# Altium PCB CAMERA.PcbDoc (part 2 of 2)
Units mm, origin at the board's own origin, x right, y up, seen from the top; angles counter-clockwise.
Board outline 40.01 x 40 mm, 8 copper layers (L1-TOP, L2-GND/PWR, L3-GND, L4-SIGNAL, L5-SIGNAL, L6-GND, L7-GND/PWR, L8-BOT), stack 1.6 mm thick; 313 components, 254 nets, 1654 pads, 0 vias.
Unrouted connection lines stored in the file: 1132.
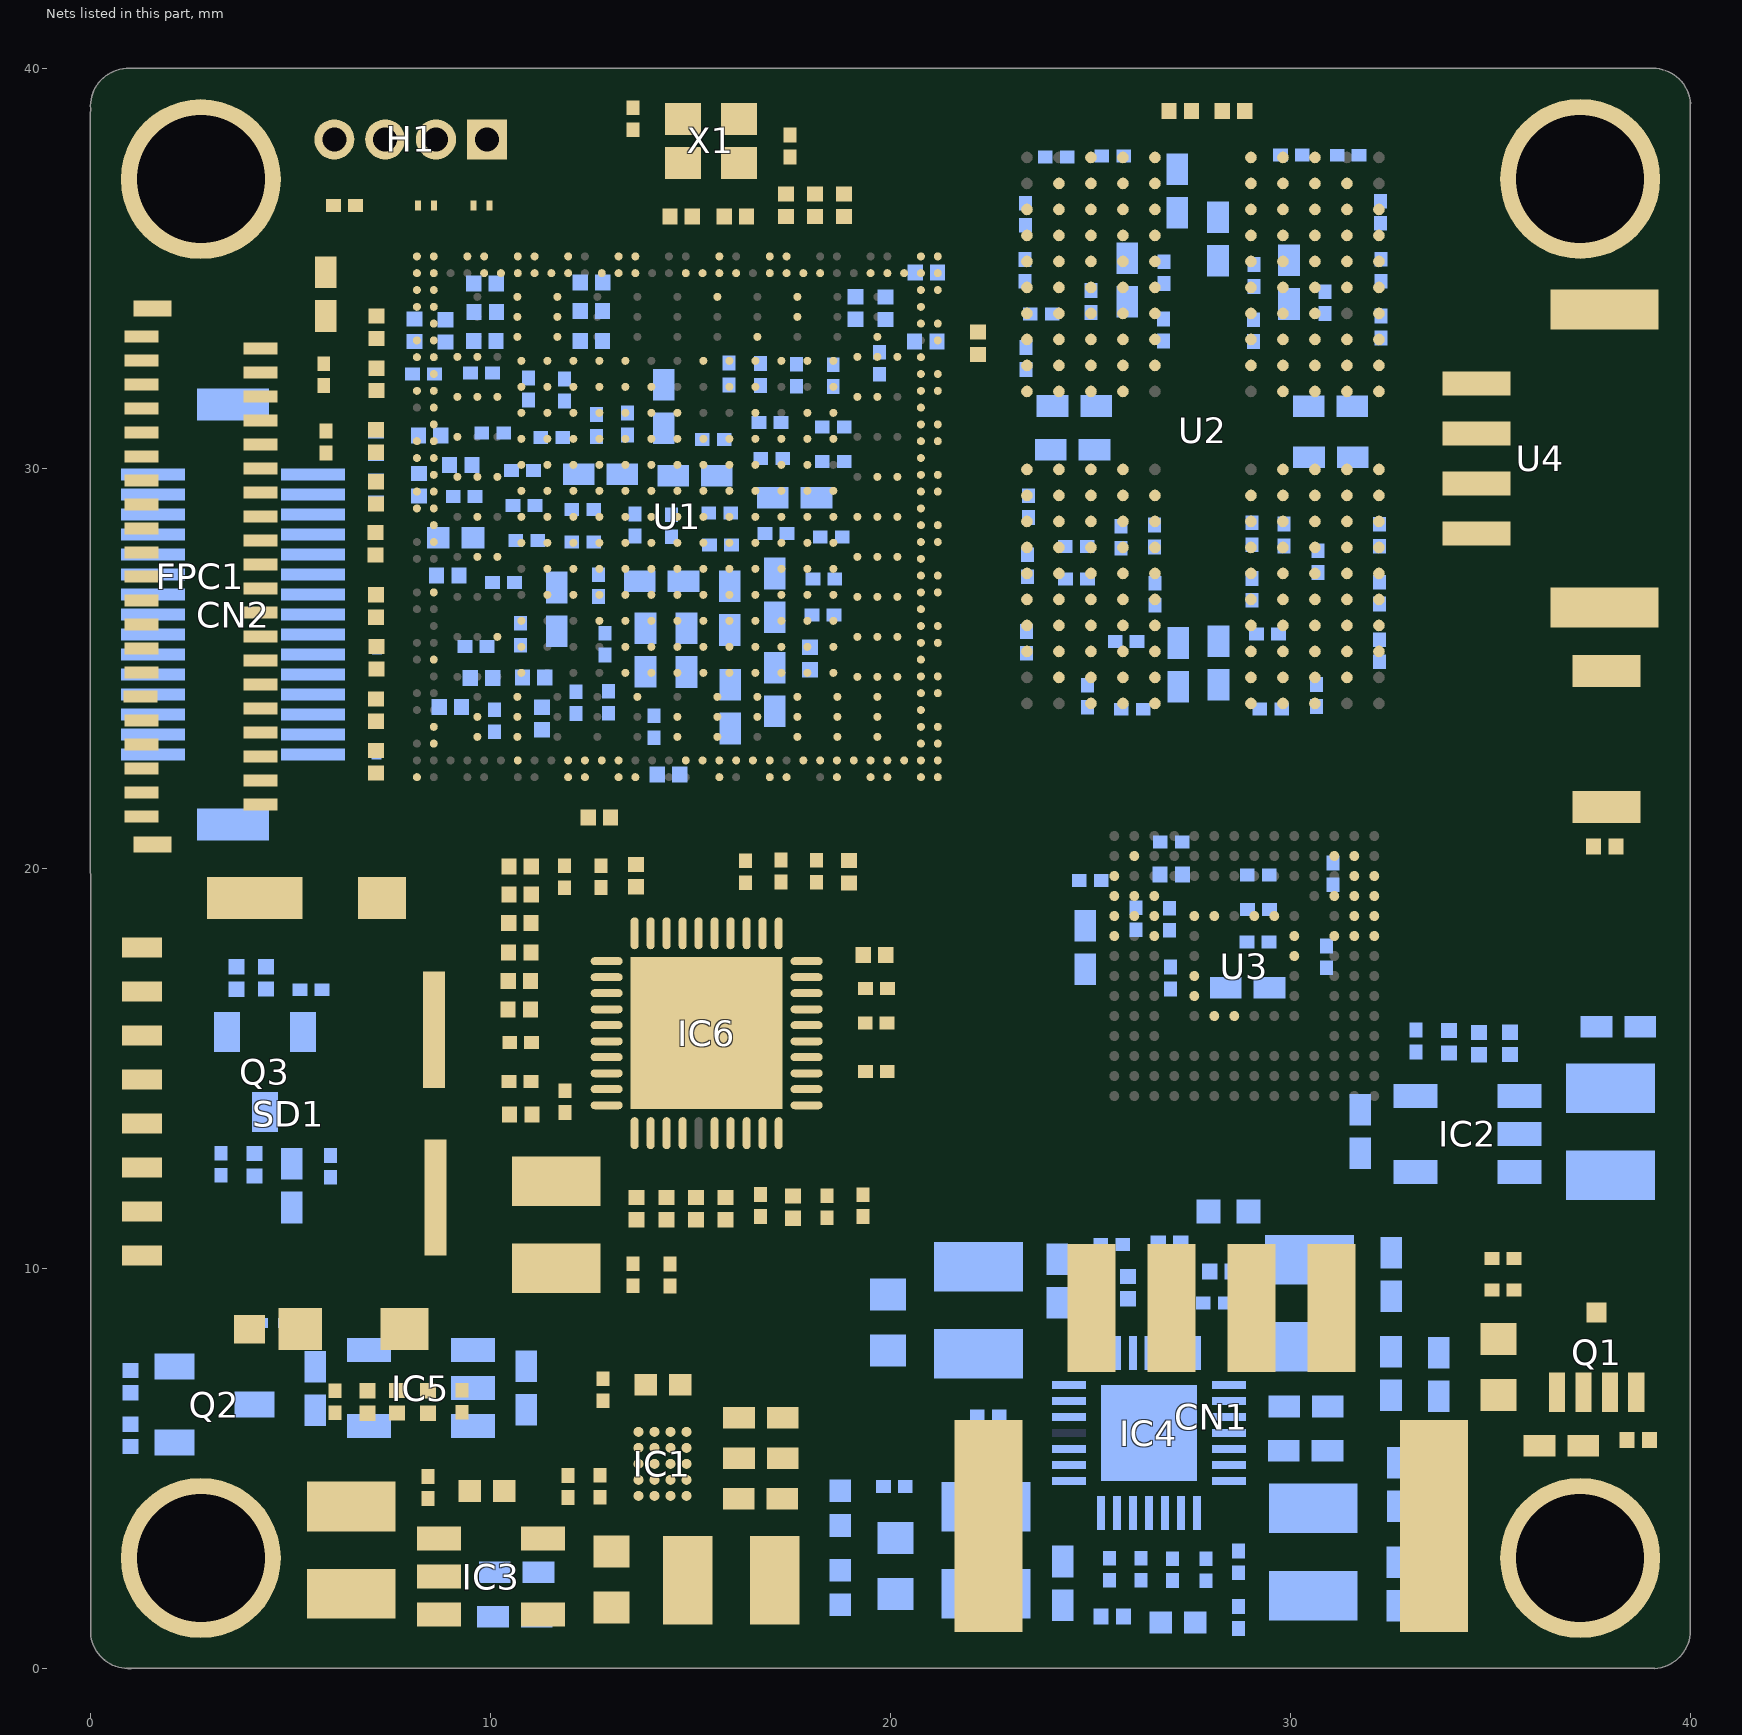
[diagram p2: the nets of this part, all layers, seen from the top]

## Part data
C1: library part CAP_22uF-25V-20%-0603, "22uF ±20% 25V Ceramic Capacitor X5R 0603"
C2 C8 C10 C11 C17 C18 C34: library part CAP_100nF-16V-10%-0201, "CAP CER 100nF 16V X5R 0201"
C3 C21 C22 C23 C24 C25 C27 C38 C39 C41: library part CAP_1uF-10V-10%-0201, "1uF ±10% 10V Ceramic Capacitor X5R 0201"
C4 C139 C141 C144: library part CAP_4.7uF-16V-10%-0402, "4.7uF ±10% 16V Ceramic Capacitor X5R 0402"
C5 C6 C7 C13 C16 C29 C30 C31 C35 C36 C37: library part CAP_22uF-10V-20%-0402, "22uF X5R ±20% 10V 0402 Ceramic Capacitors RoHS", ComponentLink1Description=LCSC, ComponentLink1URL=https://www.lcsc.com/product-detail/C385994.html?s_z=n_q_t_22UF&spm=wm.fly.bg.2.xh___wm.ssy.tc.2.tz&lcsc_vid=EwRWBFZSQVIPVFdUTlJfVldeFFRYUFQAElRYBFRRE1MxVlNeRFZbX1BRRVlbVDsOAxUeFF5JWBYZEEoKFBINSQcJGk4NBhADEA4cHktXRlhXSQwSGg0%3D
C9 C19 C28: library part CAP_22uF-16V-20%-0603, "22uF ±20% 16V Ceramic Capacitor X5R 0603"
C12 C15 C26 C32 C33 C40 C43 C46 C49 C50 C54 C55 C56 C59 C67 C70 C75 C81 C85 C99 C103 C117 C128 C133 C184: library part CAP_10uF-10V-20%-0402, "10µF ±20% 10V Ceramic Capacitor X5R 0402 (1005 Metric)"
C14: library part CAP_22pF-50V-5%-0201, "CAP CER 22pF 50V NP0 0201"
C20: library part CAP_47pF-50V-5%-0201, "CAP CER  47pF ±5% 50V C0G 0201"
C42 C45 C48 C53 C58 C63 C64 C65 C66 C69 C71 C72 C73 C74 C76 C77 C83 C87 C88 C89 C90 C91 C92 C93 C94 C95 C96 C97 C101 C105 C106 C107 C108 C109 C110 C111 C112 C113 C114 C115 C119 C120 C121 C122 C124 C125 C126 C127 C130 C131 C132 C135 C136 C137 C138 C143 C145 C146 C147 C148 C152 C153 C154 C155 C156 C157 C158 C159 C160 C161 C162 C163 C164 C165 C166 C168 C169 C170 C172 C173 C174 C175 C178 C180 C181 C183 C185 C189 C190: library part CAP_100nF-6.3V-10%-0201_1, "0.1uF ±10% 6.3V Ceramic Capacitor X5R 0201"
C44 C47 C52 C57 C62 C68 C82 C86 C100 C104 C118 C129 C134 C149 C167 C171 C176 C177 C179 C182: library part CAP_1uF-6.3V-10%-0201, "1uF ±10% 6.3V Ceramic Capacitor X5R 0201"
C51: library part CAP_4.7uF-10V-10%-0402, "4.7µF ±10% 10V Ceramic Capacitor X5R 0402 (1005 Metric)"
C60 C61: library part CAP_15pF-25V-5%-0201, "CAP CER 15pF 50V NP0 0201", ComponentLink1Description=LCSC, ComponentLink1URL=https://www.lcsc.com/product-detail/C277480.html?s_z=n_q_t_15PF&spm=wm.fly.bg.0.xh___wm.ssy.tc.0.tz&lcsc_vid=EwRWBFZSQVIPVFdUTlJfVldeFFRYUFQAElRYBFRRE1MxVlNeRFdcX11TTlBaVjsOAxUeFF5JWBYZEEoKFBINSQcJGk4NBhADEA4cHktXRlRZSQwSGg0%3D
C80 C84 C98 C102 C116: library part CAP_22uF-6.3V-20%-0402, "22uF X5R ±20% 6.3V 0402 Ceramic Capacitors RoHS", ComponentLink1Description=LCSC, ComponentLink1URL=https://www.lcsc.com/product-detail/C385994.html?s_z=n_q_t_22UF&spm=wm.fly.bg.2.xh___wm.ssy.tc.2.tz&lcsc_vid=EwRWBFZSQVIPVFdUTlJfVldeFFRYUFQAElRYBFRRE1MxVlNeRFZbX1BRRVlbVDsOAxUeFF5JWBYZEEoKFBINSQcJGk4NBhADEA4cHktXRlhXSQwSGg0%3D
C140 C142 C150 C151: library part CAP_1nF-50V-10%-0201, "CAP CER 1nF 50V X7R 0201"
CN1: library part 5023520401, "DuraClik(MX 2.0) 125V 4 1 2mm 3A Surface Mount, Right Angle Tin -40℃~+105℃ 4P Black 1x4P SMD,P=2mm,Surface Mount,Right Angle Headers, Male Pins RoHS"
CN2: "0.5mm Pitch SMT Board-to-Board Connectors, 5Gbps Transmission Speed"
D1: library part LTVS8H5.0CAT5G
D2 D3 D4 D5 D6 D7 D8 D9 D10 D11 D12 D13 D14 D15: library part PESD5V0H1BSFYL, "ESD DIODE 5VWM 5VC DSN0603-2 0.13PF"
FPC1: "CONN FFC FPC 41POS 0.3mm TOP AND BOTTOM CNT SMD R/A"
H1: library part PZ127V-11-04-0720, "Through Hole -40℃~+105℃ 2P 1A 4.3mm 1x2P 1.27mm Top 1 Square Hole Through Hole,P=1.27mm Headers, Receptacles, Female Sockets RoHS"
IC1: "High-efficiency 5.5V, 6A, 2.4MHz synchronous buck regulator"
IC2 IC3: "High Efficiency, 1.5MHz, 2A Synchronous Step Down Regulator", ComponentLink1Description=LCSC, ComponentLink1URL=https://www.lcsc.com/product-detail/C479074.html?s_z=n_q_SY8089A&spm=wm.fly.bg.0.xh&lcsc_vid=EwRWBFZSQVIPVFdUTlJfVldeFFRYUFQAElRYBFRRE1MxVlNeRVlcV1JUT1FeXzsOAxUeFF5JWBYZEEoKFBINSQcJGk4NBhADEA4cHktXR1NXSQwSGg0%3D
IC4: "I2C QFN-28-EP(4x4) Power Management - Specialized RoHS"
IC5: "300mA, Ultra-low noise, Small Package Ultra-Fast CMOS LDO Regulator", ComponentLink1Description=LCSC, ComponentLink1URL=https://www.lcsc.com/product-detail/C324567.html?s_z=n_q_LP3983SAB5F-08&spm=wm.fly.bg.0.xh&lcsc_vid=EwRWBFZSQVIPVFdUTlJfVldeFFRYUFQAElRYBFRRE1MxVlNeRVlfX1BQRFFcUTsOAxUeFF5JWBYZEEoKFBINSQcJGk4dAgUUFAk%3D
IC6: "Integrated 10/100/1000M Ethernet Precision Transceiver"
L1 L4 L5: library part IND_470nH-6.5A-20%-1008, "FIXED IND 0.47uH 6.5A 13mΩ SMD,2x2.5mm", Case/Package=1008, Manufacturer="Murata Electronics", Manufacturer Part Number=DFE252010P-R47M=P2, Supplier-1=Digikey
L2 L3: library part IND_1uH-4A-20%-1008, "FIXED IND 01uH 4A 35mΩ SMD,2x2.5mm", Case/Package=1008, Manufacturer="Murata Electronics", Manufacturer Part Number=DFE252010P-R47M=P2, Supplier-1=Digikey
L6 L7: library part IND_2.2uH-4.1A-20%-1008, "2.2uH Shielded Wirewound Inductor 4.1A 60mOhm Max 1008 (2520 Metric)", Case/Package=1008, Manufacturer="Murata Electronics", Manufacturer Part Number=DFE252010-R47M=P2, ComponentLink1Description=LCSC, ComponentLink1URL=https://www.lcsc.com/product-detail/C45385204.html?s_z=n_q_t_2.2UH&spm=wm.fly.bg.0.xh___wm.ssy.tc.0.tz&lcsc_vid=EwRWBFZSQVIPVFdUTlJfVldeFFRYUFQAElRYBFRRE1MxVlNeRVlWUV1XQ1hZVjsOAxUeFF5JWBYZEEoKFBINSQcJGk4NBhADEA4cHktXRlVcSQwSGg0%3D, Supplier-1=Digikey
L8 L9 L10 L11 L12 L13: library part MPZ0603S121HT000, "120 Ohms @ 100MHz 1 Power Line Ferrite Bead 0201 1A 130mOhm", Simulation ModelName=FB_220_ADV, Simulation ModelText=".SUBCKT FB_220_ADV 1 2 /  / Rdc 1 2 0.045 /  / * low freq inductive / L1 1 3 50n / R1 3 2 1 /  / * high freq loss / R2 1 2 200 / Cpar 1 2 2p /  / .ends FB_220_ADV", Simulation PortMap=(1:1),(2:2)
L14: library part IND_2.2uH-4.1A-20%-1008, "2.2uH Shielded Wirewound Inductor 4.1A 60mOhm Max 1008 (2520 Metric)", Case/Package=1008, Manufacturer="Murata Electronics", Manufacturer Part Number=DFE252010P-R47M=P2, Supplier-1=Digikey
Q1: library part SI7615CDN-T1-GE3-MS, "22W 20V 60A 700mV 7mΩ@4.5V 1 P-Channel P-Channel DFN-8L(3x3) Single FETs, MOSFETs RoHS", Case/Package="PowerPAK® 1212-8", Manufacturer="Vishay Siliconix", Manufacturer Part Number=SI7615CDN-T1-GE3, Supplier-1=Digikey
Q2: library part JSM2302A-A2SHB, "MOSFET N-CH 20V 3A SOT-23"
Q3: library part WPM3407-3/TR, "MOSFET P-CH 30V 4.4A SOT-23"
R1 R3: library part RES_200K-50mW-1%-0201, "RES 200kΩ ±1% 50mW 0201", Simulation ModelName=R_Resistor_Default, Simulation ModelText="R_Resistor_Default 1 0 1K", Simulation PortMap=(1:1),(2:2)
R2 R6: library part RES_23.7K-0.063W-0.1%-0402, "RES 23700Ω ±0.1% 0.063W 0402", ComponentLink1Description=LCSC, ComponentLink1URL=https://www.lcsc.com/product-detail/C2076022.html?s_z=n_q_t_23.7K&spm=wm.fly.bg.0.xh___wm.ssy.tc.0.tz&lcsc_vid=EwRWBFZSQVIPVFdUTlJfVldeFFRYUFQAElRYBFRRE1MxVlNeRFdWV1xeQVRYUzsOAxUeFF5JWBYZEEoKFBINSQcJGk4NBhADEA4cHktXR1NXSQwSGg0%3D, Simulation ModelName=R_Resistor_Default, Simulation ModelText="R_Resistor_Default 1 0 1K", Simulation PortMap=(1:1),(2:2)
R4 R35 R39: library part RES_100K-50mW-1%-0201, "RES 100kΩ ±1% 50mW 0201", ComponentLink1Description=LCSC, ComponentLink1URL=https://www.lcsc.com/product-detail/C295718.html?s_z=n_q_t_120%2520OHM&spm=wm.fly.bg.5.xh___wm.ssy.tc.1.tz&lcsc_vid=EwRWBFZSQVIPVFdUTlJfVldeFFRYUFQAElRYBFRRE1MxVlNeRFZeU1BfTlBYVzsOAxUeFF5JWBYZEEoKFBINSQcJGk4eFQsCAgIaSgADAwAHC0slRVhcV1ZTT08GEwkK, Simulation ModelName=R_Resistor_Default, Simulation ModelText="R_Resistor_Default 1 0 1K", Simulation PortMap=(1:1),(2:2)
R5 R26 R33 R36 R38 R40 R47 R48 R50 R55: library part RES_10K-50mW-1%-0201, "RES 10KΩ ±1% 50mW 0201", ComponentLink1Description=LCSC, ComponentLink1URL=https://www.lcsc.com/product-detail/C93949.html?spm=wm.fly.bg.0.xh&lcsc_vid=EwRWBFZSQVIPVFdUTlJfVldeFFRYUFQAElRYBFRRE1MxVlNeRVlXUFNQQ1RWXjsOAxUeFF5JWBYZEEoKFBINSQcJGk4eFQsCAgIaSgADAwAHC0slRlVYUFFIHxUDCw%3D%3D, Simulation ModelName=R_Resistor_Default, Simulation ModelText="R_Resistor_Default 1 0 1K", Simulation PortMap=(1:1),(2:2)
R7: library part RES_2.2M-62.5W-1%-0402, "RES 2.2MΩ ±1% 62.5mW 0402", ComponentLink1Description=LCSC, ComponentLink1URL=https://www.lcsc.com/product-detail/C2998080.html?spm=wm.fly.bg.0.xh&lcsc_vid=EwRWBFZSQVIPVFdUTlJfVldeFFRYUFQAElRYBFRRE1MxVlNeRVlXUFNQQ1RWXjsOAxUeFF5JWBYZEEoKFBINSQcJGk4eFQsCAgIaSgADAwAHC0slRlVYUFFIHxUDCw%3D%3D, Simulation ModelName=R_Resistor_Default, Simulation ModelText="R_Resistor_Default 1 0 1K", Simulation PortMap=(1:1),(2:2)
R8: library part RES_1M-50mW-0.1%-0201, "RES 1MΩ ±0.1% 50mW 0201", ComponentLink1Description=LCSC, ComponentLink1URL=https://www.lcsc.com/product-detail/C93949.html?spm=wm.fly.bg.0.xh&lcsc_vid=EwRWBFZSQVIPVFdUTlJfVldeFFRYUFQAElRYBFRRE1MxVlNeRVlXUFNQQ1RWXjsOAxUeFF5JWBYZEEoKFBINSQcJGk4eFQsCAgIaSgADAwAHC0slRlVYUFFIHxUDCw%3D%3D, Simulation ModelName=R_Resistor_Default, Simulation ModelText="R_Resistor_Default 1 0 1K", Simulation PortMap=(1:1),(2:2)
R9: library part RES_96.5K-0.1W-0.1%-0402, "RES 96.5kΩ ±0.1% 62.5mW 0402", ComponentLink1Description=LCSC, ComponentLink1URL=https://www.lcsc.com/product-detail/C852962.html?s_z=n_q_t_96.5k&spm=wm.fly.bg.0.xh___wm.ssy.tc.0.tz&lcsc_vid=EwRWBFZSQVIPVFdUTlJfVldeFFRYUFQAElRYBFRRE1MxVlNeRFdZVVBVQ1VfVzsOAxUeFF5JWBYZEEoKFBINSQcJGk4dAgUUFAk%3D, Simulation ModelName=R_Resistor_Default, Simulation ModelText="R_Resistor_Default 1 0 1K", Simulation PortMap=(1:1),(2:2)
R10: library part RES_49.9K-0.1W-0.1%-0402, "RES 49.9kΩ ±0.1% 62.5mW 0402", ComponentLink1Description=LCSC, ComponentLink1URL=https://www.lcsc.com/product-detail/C852808.html?spm=wm.fly.bg.1.xh&lcsc_vid=EwRWBFZSQVIPVFdUTlJfVldeFFRYUFQAElRYBFRRE1MxVlNeRFdZVVFWTlNbVTsOAxUeFF5JWBYZEEoKFBINSQcJGk4eFQsCAgIaSgADAwAHC0slT1RcXlJUWQkaCgg%3D, Simulation ModelName=R_Resistor_Default, Simulation ModelText="R_Resistor_Default 1 0 1K", Simulation PortMap=(1:1),(2:2)
R11 R12 R13 R14 R23 R24 R57 R58 R59 R71 R72 R74: library part RES_4.7K-50mW-1%-0201, "RES 4.7kΩ ±1% 50mW 0201", ComponentLink1Description=LCSC, ComponentLink1URL=https://www.lcsc.com/product-detail/C295718.html?s_z=n_q_t_120%2520OHM&spm=wm.fly.bg.5.xh___wm.ssy.tc.1.tz&lcsc_vid=EwRWBFZSQVIPVFdUTlJfVldeFFRYUFQAElRYBFRRE1MxVlNeRFZeU1BfTlBYVzsOAxUeFF5JWBYZEEoKFBINSQcJGk4eFQsCAgIaSgADAwAHC0slRVhcV1ZTT08GEwkK, Simulation ModelName=R_Resistor_Default, Simulation ModelText="R_Resistor_Default 1 0 1K", Simulation PortMap=(1:1),(2:2)
R15: library part RES_30Ω-0.05W-1%-0201, "RES 30Ω ±1% 50mW 0201", ComponentLink1Description=LCSC, ComponentLink1URL=https://www.lcsc.com/product-detail/C320826.html?spm=wm.fly.bg.3.xh&lcsc_vid=EwRWBFZSQVIPVFdUTlJfVldeFFRYUFQAElRYBFRRE1MxVlNeRFdcXlNfT1JZVDsOAxUeFF5JWBYZEEoKFBINSQcJGk4eFQsCAgIaSgADAwAHC0slRlRbUFBVWQkaCgg%3D, Simulation ModelName=R_Resistor_Default, Simulation ModelText="R_Resistor_Default 1 0 1K", Simulation PortMap=(1:1),(2:2)
R16: library part RES_1M-0.1W-5%-0201, "RES 1MΩ ±5% 50mW 0201", ComponentLink1Description=LCSC, ComponentLink1URL=https://www.lcsc.com/product-detail/C93949.html?spm=wm.fly.bg.0.xh&lcsc_vid=EwRWBFZSQVIPVFdUTlJfVldeFFRYUFQAElRYBFRRE1MxVlNeRVlXUFNQQ1RWXjsOAxUeFF5JWBYZEEoKFBINSQcJGk4eFQsCAgIaSgADAwAHC0slRlVYUFFIHxUDCw%3D%3D, Simulation ModelName=R_Resistor_Default, Simulation ModelText="R_Resistor_Default 1 0 1K", Simulation PortMap=(1:1),(2:2)
R17 R18: library part RES_510-0.05W-1%-0201, "510Ω 50mW 25V Thick Film Resistor ±200ppm/℃ ±1% 0201 Chip Resistor - Surface Mount RoHS", Simulation ModelName=R_Resistor_Default, Simulation ModelText="R_Resistor_Default 1 0 1K", Simulation PortMap=(1:1),(2:2)
R19 R49: library part RES_100OHM-50mW-1%-0201, "RES 100Ω ±1% 50mW 0201", Simulation ModelName=R_Resistor_Default, Simulation ModelText="R_Resistor_Default 1 0 1K", Simulation PortMap=(1:1),(2:2)
R20: library part RES_120-50mW-1%-0201, "RES 120Ω ±1% 50mW 0201", ComponentLink1Description=LCSC, ComponentLink1URL=https://www.lcsc.com/product-detail/C295718.html?s_z=n_q_t_120%2520OHM&spm=wm.fly.bg.5.xh___wm.ssy.tc.1.tz&lcsc_vid=EwRWBFZSQVIPVFdUTlJfVldeFFRYUFQAElRYBFRRE1MxVlNeRFZeU1BfTlBYVzsOAxUeFF5JWBYZEEoKFBINSQcJGk4eFQsCAgIaSgADAwAHC0slRVhcV1ZTT08GEwkK, Simulation ModelName=R_Resistor_Default, Simulation ModelText="R_Resistor_Default 1 0 1K", Simulation PortMap=(1:1),(2:2)
R21 R22: library part RES_240-0.063W-1%-0201, "RES 240Ω ±1% 50mW 0201", ComponentLink1Description=LCSC, ComponentLink1URL=https://www.lcsc.com/product-detail/C155745.html?s_z=n_q_t_240%2520OHM&spm=wm.fly.bg.0.xh___wm.ssy.tc.0.tz&lcsc_vid=EwRWBFZSQVIPVFdUTlJfVldeFFRYUFQAElRYBFRRE1MxVlNeRFdWVFBQTlZbVTsOAxUeFF5JWBYZEEoKFBINSQcJGk4dAgUUFAk%3D, Simulation ModelName=R_Resistor_Default, Simulation ModelText="R_Resistor_Default 1 0 1K", Simulation PortMap=(1:1),(2:2)
R25 R27 R28 R29 R30 R31 R32 R46 R60 R61 R76 R77 R78 R79 R80 R81: library part RES_22-50mW-1%-0201, "RES 22Ω ±1% 50mW 0201", ComponentLink1Description=LCSC, ComponentLink1URL=https://www.lcsc.com/product-detail/C295718.html?s_z=n_q_t_120%2520OHM&spm=wm.fly.bg.5.xh___wm.ssy.tc.1.tz&lcsc_vid=EwRWBFZSQVIPVFdUTlJfVldeFFRYUFQAElRYBFRRE1MxVlNeRFZeU1BfTlBYVzsOAxUeFF5JWBYZEEoKFBINSQcJGk4eFQsCAgIaSgADAwAHC0slRVhcV1ZTT08GEwkK, Simulation ModelName=R_Resistor_Default, Simulation ModelText="R_Resistor_Default 1 0 1K", Simulation PortMap=(1:1),(2:2)
R34: library part RES_127K-50mW-1%-0201, "RES 127kΩ ±1% 50mW 0201", ComponentLink1Description=LCSC, ComponentLink1URL=https://www.lcsc.com/product-detail/C295718.html?s_z=n_q_t_120%2520OHM&spm=wm.fly.bg.5.xh___wm.ssy.tc.1.tz&lcsc_vid=EwRWBFZSQVIPVFdUTlJfVldeFFRYUFQAElRYBFRRE1MxVlNeRFZeU1BfTlBYVzsOAxUeFF5JWBYZEEoKFBINSQcJGk4eFQsCAgIaSgADAwAHC0slRVhcV1ZTT08GEwkK, Simulation ModelName=R_Resistor_Default, Simulation ModelText="R_Resistor_Default 1 0 1K", Simulation PortMap=(1:1),(2:2)
R37: library part RES_47K-50mW-1%-0201, "47kΩ 50mW 25V Thick Film Resistor ±1% ±200ppm/℃ 0201 Chip Resistor - Surface Mount RoHS", ComponentLink1Description=LCSC, ComponentLink1URL=https://www.lcsc.com/product-detail/C295718.html?s_z=n_q_t_120%2520OHM&spm=wm.fly.bg.5.xh___wm.ssy.tc.1.tz&lcsc_vid=EwRWBFZSQVIPVFdUTlJfVldeFFRYUFQAElRYBFRRE1MxVlNeRFZeU1BfTlBYVzsOAxUeFF5JWBYZEEoKFBINSQcJGk4eFQsCAgIaSgADAwAHC0slRVhcV1ZTT08GEwkK, Simulation ModelName=R_Resistor_Default, Simulation ModelText="R_Resistor_Default 1 0 1K", Simulation PortMap=(1:1),(2:2)
R51 R52 R53 R54: library part RES_2.2-50mW-1%-0201, "RES 2.2Ω ±1% 50mW 0201", ComponentLink1Description=LCSC, ComponentLink1URL=https://www.lcsc.com/product-detail/C295718.html?s_z=n_q_t_120%2520OHM&spm=wm.fly.bg.5.xh___wm.ssy.tc.1.tz&lcsc_vid=EwRWBFZSQVIPVFdUTlJfVldeFFRYUFQAElRYBFRRE1MxVlNeRFZeU1BfTlBYVzsOAxUeFF5JWBYZEEoKFBINSQcJGk4eFQsCAgIaSgADAwAHC0slRVhcV1ZTT08GEwkK, Simulation ModelName=R_Resistor_Default, Simulation ModelText="R_Resistor_Default 1 0 1K", Simulation PortMap=(1:1),(2:2)
R56: library part RES_15K-0.05W-1%-0201, "RES 15kΩ ±1% 50mW 0201", Simulation ModelName=R_Resistor_Default, Simulation ModelText="R_Resistor_Default 1 0 1K", Simulation PortMap=(1:1),(2:2)
R62 R63 R64 R65 R66 R67 R68 R69 R75: library part RES_0OHM-50mW-1%-0201, "RES 0Ω ±1% 50mW 0201", ComponentLink1Description=LCSC, ComponentLink1URL=https://www.lcsc.com/product-detail/C295718.html?s_z=n_q_t_120%2520OHM&spm=wm.fly.bg.5.xh___wm.ssy.tc.1.tz&lcsc_vid=EwRWBFZSQVIPVFdUTlJfVldeFFRYUFQAElRYBFRRE1MxVlNeRFZeU1BfTlBYVzsOAxUeFF5JWBYZEEoKFBINSQcJGk4eFQsCAgIaSgADAwAHC0slRVhcV1ZTT08GEwkK, Simulation ModelName=R_Resistor_Default, Simulation ModelText="R_Resistor_Default 1 0 1K", Simulation PortMap=(1:1),(2:2)
R70: library part RES_1.5K-0.05W-1%-0201, "RES 1500Ω ±1% 0.05W 0201", ComponentLink1Description=LCSC, ComponentLink1URL=https://www.lcsc.com/product-detail/C93949.html?spm=wm.fly.bg.0.xh&lcsc_vid=EwRWBFZSQVIPVFdUTlJfVldeFFRYUFQAElRYBFRRE1MxVlNeRVlXUFNQQ1RWXjsOAxUeFF5JWBYZEEoKFBINSQcJGk4eFQsCAgIaSgADAwAHC0slRlVYUFFIHxUDCw%3D%3D, Simulation ModelName=R_Resistor_Default, Simulation ModelText="R_Resistor_Default 1 0 1K", Simulation PortMap=(1:1),(2:2)
R73: library part RES_2.49K-0.05W-1%-0201, "RES 2.49kΩ ±1% 50mW 0201", ComponentLink1Description=LCSC, ComponentLink1URL=https://www.lcsc.com/product-detail/C320826.html?spm=wm.fly.bg.3.xh&lcsc_vid=EwRWBFZSQVIPVFdUTlJfVldeFFRYUFQAElRYBFRRE1MxVlNeRFdcXlNfT1JZVDsOAxUeFF5JWBYZEEoKFBINSQcJGk4eFQsCAgIaSgADAwAHC0slRlRbUFBVWQkaCgg%3D, Simulation ModelName=R_Resistor_Default, Simulation ModelText="R_Resistor_Default 1 0 1K", Simulation PortMap=(1:1),(2:2)
SD1: library part 1051620001, "CONN MICRO SD CARD (TF CARD)"
SW1: "12V 2.5mm Round Button 3mm SPST 50mA SMD,3x2.5mm Tactile Switches ROHS"
U2: "DRAM LPDDR4X, 32Gb, 1G X 32, 0.6v, 200ball TFBGA,2133MHZ,industrial Temp", Manufacturer_Name="Alliance Memory", Mouser Part Number=913-AS4C1G32MD4046BI, Datasheet Link=https://www.alliancememory.com/wp-content/uploads/pdf/ddr4/AllianceMemory_8Gb_16Gb_32Gb_LPDDR4X_AS4C512M16MD4V_AS4C512M32MD4V_AS4C1G32MD4V.pdf, Geometry.Height=1mm, Manufacturer_Part_Number=AS4C1G32MD4V-046BIN, Mouser Price/Stock=https://www.mouser.co.uk/ProductDetail/Alliance-Memory/AS4C1G32MD4V-046BIN?qs=2wMNvWM5ZX7JcOV9cKEgAg%3D%3D
U3: library part KLMAG1JETD-B041, "eMMC 5.1 Specification compatibility"
U4: "CONN HEADER SMD R/A 4POS 1.25mm"
X1: library part XTAL_24Mhz-12pF-4-SMD, "CRYSTAL 24MHz 12pF SMD", ComponentLink1Description=LCSC, ComponentLink1URL=https://www.lcsc.com/product-detail/C37635324.html?spm=wm.fly.bg.3.xh&lcsc_vid=EwRWBFZSQVIPVFdUTlJfVldeFFRYUFQAElRYBFRRE1MxVlNeRFdcUVxRR1BcVjsOAxUeFF5JWBYZEEoKFBINSQcJGk4eFQsCAgIaSgADAwAHC0slRVlaVlJXWQkaCgg%3D

## Nets (pads, with @x,y where several pads share a name; then routed paths per layer and width w, separated by ;. In a path a pad name is that pad's centre, name@x,y a point inside that pad or via, vN(x,y) a via of type N, cw(c..) or ccw(c..) an arc to the next point about the centre after c; other vN are vias at no path point)
0V9: C39.2 C154.2 C161.2 C162.2 IC4.19 U1.K2-12 U1.L2-12 U1.M2-1
3V3SYS: C8.2 C9.2 C10.2 C15.2 C21.2 C29.2 C30.2 C31.2 C65.2 C66.2 C190.2 H1.3 IC1.D1 IC1.D2 IC1.E1 IC1.E2 IC3.4 IC4.10 IC4.26 L6.2 L10.1 L11.1 R2.2 R6.2 R11.2 R12.2 R13.2 R14.2 R74.2 U1.L2-4 U1.M2-5
5VIN: C183.2 C184.2 CN1.3 CN1.4 CN2.18 CN2.20 CN2.22 CN2.24 CN2.26 CN2.28 CN2.30 D1.2 FPC1.34 FPC1.36 FPC1.38 FPC1.40 Q1.1 Q1.2 Q1.3
5VSYS: C1.2 C2.2 C3.2 C12.2 C23.2 C24.2 C25.2 C26.2 C32.1 C33.2 C40.2 C139.2 IC2.4 IC4.1 IC4.5 IC4.9 IC4.13 IC4.17 IC4.18 IC4.21 IC5.1 Q1.5 R5.1 R7.2
AVDD10: C171.2 C172.2 C173.2 C174.2 IC6.3 IC6.8 IC6.38 L12.2
AVDD33: C177.2 C178.2 C179.2 C180.2 IC6.11 IC6.40 L10.2
BST1: C34.1 IC4.15
BST2: C27.2 IC4.6
CAM_CLK0: FPC1.18 R61.2
CAM_CLK1: FPC1.14 R60.2
CAN1_RX_M0: U1.A1-22 U4.3
CAN1_TX_M0: R57.1 U1.B1-22 U4.2
CE: C142.2 IC5.3 R33.2
CFG_LDO0: CN2.27 IC6.33 R72.2
CFG_LDO1: CN2.29 IC6.34 R71.2
DDR_RESET: U1.A2-1 U2.T11
DDRA_A0: U1.B8 U2.H2
DDRA_A1: U1.C1-4 U2.J2
DDRA_A2: U1.A1-12 U2.H9
DDRA_A3: U1.B14 U2.H10
DDRA_A4: U1.B1-12 U2.H11
DDRA_A5: U1.A11 U2.J11
DDRA_CKE0: U1.A10 U2.J4
DDRA_CKE1: U1.B13 U2.J5
DDRA_CLK_N: U1.C1-10 U2.J9
DDRA_CLK_P: U1.B1-10 U2.J8
DDRA_CS0: U1.B11 U2.H4
DDRA_CS1: U1.A7 U2.H3
DDRA_D0: U1.Y2 U2.B2
DDRA_D1: U1.W1 U2.C2
DDRA_D2: U1.V1 U2.E2
DDRA_D3: U1.V2 U2.F2
DDRA_D4: U1.AE1 U2.F4
DDRA_D5: U1.AD1 U2.E4
DDRA_D6: U1.AD2 U2.C4
DDRA_D7: U1.AC2 U2.B4
DDRA_D8: U1.R1 U2.B11
DDRA_D9: U1.M1-3 U2.C11
DDRA_D10: U1.R2 U2.E11
DDRA_D11: U1.H1-1 U2.F11
DDRA_D12: U1.T2 U2.F9
DDRA_D13: U1.T1 U2.E9
DDRA_D14: U1.H1-3 U2.C9
DDRA_D15: U1.P1-1 U2.B9
DDRA_DM0: U1.W2 U2.C3
DDRA_DM1: U1.M1-1 U2.C10
DDRA_DQS0_N: U1.AA1 U2.E3
DDRA_DQS0_P: U1.AB1 U2.D3
DDRA_DQS1_N: U1.K1-2 U2.E10
DDRA_DQS1_P: U1.K1-1 U2.D10
DDRB_A0: U1.A1-4 U2.R2
DDRB_A1: U1.B4 U2.P2
DDRB_A2: U1.A4 U2.R9
DDRB_A3: U1.A5 U2.R10
DDRB_A4: U1.B5 U2.R11
DDRB_A5: U1.A1-6 U2.P11
DDRB_CKE0: U1.C1-8 U2.P4
DDRB_CKE1: U1.C1-6 U2.P5
DDRB_CLK_N: U1.A1-2 U2.P9
DDRB_CLK_P: U1.B1-2 U2.P8
DDRB_CS0: U1.B7 U2.R4
DDRB_CS1: U1.A14 U2.R3
DDRB_D0: U1.M2 U2.AA2
DDRB_D1: U1.M1 U2.Y2
DDRB_D2: U1.N1 U2.V2
DDRB_D3: U1.N2 U2.U2
DDRB_D4: U1.H2 U2.U4
DDRB_D5: U1.J2 U2.V4
DDRB_D6: U1.J1 U2.Y4
DDRB_D7: U1.K1 U2.AA4
DDRB_D8: U1.C1 U2.AA11
DDRB_D9: U1.B1 U2.Y11
DDRB_D10: U1.A2 U2.V11
DDRB_D11: U1.B2 U2.U11
DDRB_D12: U1.G1 U2.U9
DDRB_D13: U1.F1 U2.V9
DDRB_D14: U1.F2 U2.Y9
DDRB_D15: U1.E2 U2.AA9
DDRB_DM0: U1.K2 U2.Y3
DDRB_DM1: U1.D2 U2.Y10
DDRB_DQS0_N: U1.F1-2 U2.V3
DDRB_DQS0_P: U1.F1-1 U2.W3
DDRB_DQS1_N: U1.D1-2 U2.V10
DDRB_DQS1_P: U1.D1-1 U2.W10
DVDD10: C175.2 C176.2 IC6.21 L13.2
DVDD33: C181.2 C182.2 IC6.29 L11.2 R71.1
EMMC_CLK: R25.2 U3.M6
EMMC_CMD: R23.1 U1.AG1 U3.M5
EMMC_D0: R24.1 U1.AL1 U3.A3
EMMC_D1: U1.V1-3 U3.A4
EMMC_D2: U1.V1-2 U3.A5
EMMC_D3: U1.AK2 U3.B2
EMMC_D4: U1.AK1 U3.B3
EMMC_D5: U1.AJ2 U3.B4
EMMC_D6: U1.AH2 U3.B5
EMMC_D7: U1.AH1 U3.B6
EMMC_RST: C126.2 R26.1 U3.K5
EN: C11.2 IC1.A2 R2.1
EN1: C17.2 IC3.1 R6.1
ETH_CLK_25M: IC6.37 R68.2
ETH_MDC_M0: IC6.13 R67.2
ETH_MDIO: IC6.14 R70.1 U1.K1-21
ETH_RX0_M0: R78.2 U1.P1-22
ETH_RX1_M0: R79.2 U1.P1-23
ETH_RX2_M0: R80.2 U1.AC31
ETH_RX3_M0: R81.2 U1.AB31
ETH_RXCLK_M0: R76.2 U1.V31
ETH_RXCTL_M0: R77.2 U1.M1-22
ETH_TX0_M0: IC6.18 R64.2
ETH_TX1_M0: IC6.17 R65.2
ETH_TX2_M0: IC6.16 R62.2
ETH_TX3_M0: IC6.15 R63.2
ETH_TXCLK_M0: IC6.20 R69.2
ETH_TXCTL_M0: IC6.19 R66.2
GND: C1.1 C2.1 C3.1 C4.2 C5.1 C6.1 C7.1 C8.1 C9.1 C10.1 C11.1 C12.1 C13.1 C15.1 C16.1 C17.1 C18.1 C19.1 C21.1 C22.1 C23.1 C24.1 C25.1 C26.1 C28.1 C29.1 C30.1 C31.1 C32.2 C33.1 C35.1 C36.1 C37.1 C38.1 C39.1 C40.1 C41.1 C42.1 C43.1 C44.1 C45.1 C46.1 C47.1 C48.1 C49.1 C50.1 C51.1 C52.1 C53.1 C54.1 C55.1 C56.1 C57.1 C58.1 C59.1 C60.1 C61.2 C62.1 C63.1 C64.1 C65.1 C66.1 C67.1 C68.1 C69.1 C70.1 C71.1 C72.1 C73.1 C74.1 C75.1 C76.1 C77.1 C80.1 C81.1 C82.1 C83.1 C84.1 C85.1 C86.1 C87.1 C88.1 C89.1 C90.1 C91.1 C92.1 C93.1 C94.1 C95.1 C96.1 C97.1 C98.1 C99.1 C100.1 C101.1 C102.1 C103.1 C104.1 C105.1 C106.1 C107.1 C108.1 C109.1 C110.1 C111.1 C112.1 C113.1 C114.1 C115.1 C116.1 C117.1 C118.1 C119.1 C120.1 C121.1 C122.1 C124.1 C125.1 C126.1 C127.1 C128.1 C129.1 C130.1 C131.1 C132.1 C133.1 C134.1 C135.1 C136.1 C137.1 C138.2 C139.1 C141.2 C142.1 C143.1 C144.1 C145.1 C147.1 C148.1 C149.2 C150.1 C151.1 C152.1 C153.1 C154.1 C155.1 C156.1 C157.1 C158.1 C159.1 C160.1 C161.1 C162.1 C163.1 C164.1 C165.1 C166.1 C167.1 C168.1 C169.1 C170.2 C171.1 C172.1 C173.1 C174.1 C175.1 C176.1 C177.1 C178.1 C179.1 C180.1 C181.1 C182.1 C183.1 C184.1 C185.1 C189.1 C190.1 CN1.1 CN1.2 CN1.5 CN1.6 CN2.3 CN2.15 CN2.31 CN2.32 D1.1 D2.1 D3.1 D4.1 D5.1 D6.1 D7.1 D8.1 D9.1 D10.1 D11.1 D12.1 D13.1 D14.1 D15.1 FPC1.6 FPC1.12 FPC1.16 FPC1.17 FPC1.20 FPC1.23 FPC1.32 FPC1.41 FPC1.42 FPC1.43 H1.4 IC1.B2 IC1.B3 IC1.B4 IC1.C1 IC1.C2 IC1.C3 IC1.C4 IC2.2 IC3.2 IC4.29 IC5.2 IC6.36 IC6.41 Q2.2 R1.1 R3.1 R8.1 R10.1 R35.1 R37.1 R38.1 R47.1 R56.1 R72.1 R73.2 S1.1 S2.1 S3.1 S4.1 SD1.0 SD1.6 SD1.G1 SD1.G2 SD1.G3 SD1.G4 SW1.2 U1.A1 U1.A1-10 U1.A2-3 U1.A2-4 U1.A2-5 U1.A2-6 U1.A2-7 U1.A2-8 U1.A2-9 U1.A2-13 U1.A19 U1.A32 U1.AA2 U1.AB2 U1.AD31 U1.AE2 U1.AH31 U1.AK31 U1.AL5 U1.AL8 U1.AL16 U1.AL19 U1.AL26 U1.AM1 U1.AM14 U1.AM32 U1.B1-4 U1.B1-6 U1.B1-8 U1.B2-1 U1.B2-2 U1.B2-3 U1.B2-4 U1.B2-5 U1.B2-6 U1.B2-7 U1.B2-13 U1.B3 U1.B6 U1.B9 U1.B12 U1.B15 U1.B23 U1.B26 U1.C1-2 U1.C1-14 U1.C1-20 U1.C2 U1.C2-1 U1.C2-2 U1.C2-6 U1.C2-7 U1.C2-8 U1.C2-9 U1.C2-10 U1.C31 U1.D1 U1.D1-3 U1.D2-1 U1.D2-2 U1.D2-4 U1.D2-5 U1.D2-9 U1.D2-10 U1.D2-11 U1.D2-12 U1.E2-1 U1.E2-2 U1.E2-9 U1.E2-11 U1.F1-3 U1.F1-21 U1.F2-1 U1.F2-2 U1.F2-6 U1.F2-7 U1.F2-8 U1.F2-9 U1.F2-11 U1.F2-13 U1.G2 U1.G2-1 U1.G2-2 U1.G2-3 U1.G2-4 U1.G2-6 U1.G2-7 U1.G2-8 U1.G2-9 U1.G2-11 U1.G2-13 U1.H1-2 U1.H2-1 U1.H2-2 U1.H2-3 U1.H2-5 U1.H2-9 U1.H2-10 U1.H2-11 U1.H2-13 U1.H31 U1.J2-3 U1.J2-5 U1.J2-10 U1.J2-11 U1.J2-13 U1.K1-3 U1.K1-22 U1.K2-1 U1.K2-3 U1.K2-6 U1.K2-7 U1.K2-8 U1.K2-9 U1.K2-10 U1.K2-13 U1.L2 U1.L2-1 U1.L2-7 U1.L2-8 U1.L2-13 U1.M1-2 U1.M2-4 U1.M2-8 U1.M2-9 U1.M2-10 U1.M2-11 U1.M2-12 U1.M2-13 U1.M31 U1.N2-1 U1.N2-2 U1.N2-3 U1.N2-4 U1.N2-5 U1.N2-6 U1.N2-9 U1.N2-10 U1.N2-11 U1.N2-12 U1.N2-13 U1.P1-2 U1.P2 U1.T31 U1.U2 U1.V1-23 U1.Y1-1 U1.Y1-2 U1.Y1-3 U1.Y1-22 U1.Y31 U2.A3 U2.A10 U2.AB3 U2.AB5 U2.AB8 U2.AB10 U2.C1 U2.C5 U2.C8 U2.C12 U2.D2 U2.D4 U2.D9 U2.D11 U2.E1 U2.E5 U2.E8 U2.E12 U2.G1 U2.G3 U2.G5 U2.G8 U2.G10 U2.G12 U2.J1 U2.J3 U2.J10 U2.J12 U2.K2 U2.K4 U2.K9 U2.K11 U2.N2 U2.N4 U2.N9 U2.N11 U2.P1 U2.P3 U2.P10 U2.P12 U2.T1 U2.T3 U2.T5 U2.T8 U2.T10 U2.T12 U2.V1 U2.V5 U2.V8 U2.V12 U2.W2 U2.W4 U2.W9 U2.W11 U2.Y1 U2.Y5 U2.Y8 U2.Y12 U3.A6 U3.C4 U3.E7 U3.G5 U3.H10 U3.J5 U3.K8 U3.N2 U3.N5 U3.P4 U3.P6 U4.1 U4.5 U4.6 X1.2 X1.4
GPIO0_A3: IC4.11 U1.AM11
GPIO0_C1_d: IC1.A1 U1.AC1-10
GPIO4_A2_PWND0: FPC1.22 U1.Y1-23
GPIO4_A3_RST0: C158.2 FPC1.24 U1.V1-21
GPIO4_A4_PWND1: FPC1.26 U1.V1-22
GPIO4_A5_RST1: C159.2 FPC1.28 U1.AF32
I2C1_SCL_M2: FPC1.10 R58.1 U1.AG32
I2C1_SDA_M2: FPC1.8 R59.1 U1.AG31
INT: IC4.7 R11.1 U1.AB1-6
MDI0_N: CN2.14 IC6.2
MDI0_P: CN2.16 IC6.1
MDI1_N: CN2.10 IC6.5
MDI1_P: CN2.12 IC6.4
MDI2_N: CN2.6 IC6.7
MDI2_P: CN2.8 IC6.6
MDI3_N: CN2.2 IC6.10
MDI3_P: CN2.4 IC6.9
MIPI_CSI_RX0_CLK0_N: FPC1.19 U1.AL23
MIPI_CSI_RX0_CLK0_P: FPC1.21 U1.AM23
MIPI_CSI_RX0_D0_N: FPC1.1 U1.AM26
MIPI_CSI_RX0_D0_P: FPC1.3 U1.AM25
MIPI_CSI_RX0_D1_N: FPC1.5 U1.AL25
MIPI_CSI_RX0_D1_P: FPC1.7 U1.AL24
MIPI_CSI_RX0_D2_N: FPC1.9 U1.AM20
MIPI_CSI_RX0_D2_P: FPC1.11 U1.AM19
MIPI_CSI_RX0_D3_N: FPC1.13 U1.AL21
MIPI_CSI_RX0_D3_P: FPC1.15 U1.AL20
MIPI_CSI_RX1_CLK0_N: FPC1.4 U1.AM31
MIPI_CSI_RX1_CLK0_P: FPC1.2 U1.AL31
MIPI_CSI_RX1_D0_N: FPC1.25 U1.AJ31
MIPI_CSI_RX1_D0_P: FPC1.27 U1.AJ32
MIPI_CSI_RX1_D1_N: FPC1.29 U1.AK32
MIPI_CSI_RX1_D1_P: FPC1.31 U1.AL32
MIPI_CSI_RX1_D2_N: FPC1.33 U1.AL28
MIPI_CSI_RX1_D2_P: FPC1.35 U1.AL27
MIPI_CSI_RX1_D3_N: FPC1.37 U1.AM29
MIPI_CSI_RX1_D3_P: FPC1.39 U1.AM28
NetC4_1: C4.1 Q1.4 R1.2
NetC14_1: C14.1 IC2.5 R3.2 R4.1
NetC127_2: C127.2 U3.C2
NetC140_1: C140.1 IC5.4 Q2.3 R34.1 R35.2
NetC146_1: C146.1 Q3.1 R39.1 R40.2
NetC150_2: C150.2 R48.1 R49.1 U1.B1-20
NetC151_2: C151.2 R50.2 U1.A1-20
NetC155_2: C155.2 R55.1 R56.2 U1.AA1-2
NetC166_2: C166.2 L9.1 U1.H2-12
NetD12_2: D12.2 R51.1 U1.AL2
NetD13_2: D13.2 R52.1 U1.AM2
NetD14_2: D14.2 R53.1 U1.AL4
NetD15_2: D15.2 R54.1 U1.AL3
NetIC1_D3: IC1.D3 IC1.D4 IC1.E3 IC1.E4 L1.1
NetIC2_1: IC2.1 R5.2
NetIC2_3: IC2.3 L2.1
NetIC3_3: IC3.3 L3.1
NetIC4_28: IC4.28 L5.1
NetIC6_22: IC6.22 R81.1
NetIC6_23: IC6.23 R80.1
NetIC6_24: IC6.24 R79.1
NetIC6_25: IC6.25 R78.1
NetIC6_26: IC6.26 R77.1
NetIC6_27: IC6.27 R76.1
NetIC6_31: IC6.31 R75.1
NetIC6_32: IC6.32 R74.1
NetQ2_1: Q2.1 R36.2 R37.2
NetR15_1: R15.1 R16.1 U1.AL14
NetR17_1: R17.1 U1.AL9
NetR18_1: R18.1 U1.AM10
NetR19_1: R19.1 U1.AL10
NetR20_2: R20.2 U1.A2-2
NetR21_2: R21.2 U2.A5
NetR22_2: R22.2 U2.A8
NetR25_1: R25.1 U1.AF2
NetR27_1: R27.1 U1.AA1-18
NetR28_1: R28.1 U1.AB1-18
NetR29_1: R29.1 U1.AA1-20
NetR30_1: R30.1 U1.AB1-20
NetR31_1: R31.1 U1.AC1-18
NetR32_1: R32.1 U1.AC1-20
NetR46_1: R46.1 U1.B22
NetR47_2: R47.2 U1.B16
NetR49_2: R49.2 SW1.1
NetR60_1: R60.1 U1.AF31
NetR61_1: R61.1 U1.AE31
NetR62_1: R62.1 U1.AA31
NetR63_1: R63.1 U1.AA32
NetR64_1: R64.1 U1.Y32
NetR65_1: R65.1 U1.W31
NetR66_1: R66.1 U1.P1-21
NetR67_1: R67.1 U1.V32
NetR68_1: R68.1 U1.U32
NetR69_1: R69.1 U1.U31
REG_OUT: IC6.30 L14.1
RESET: C41.2 IC4.4 R14.1 U1.AL11 U1.AL13
RGMII_1V: C167.2 C168.2 L12.1 L13.1 L14.2
RGMII_INT: R75.2 U1.T1-23
RSET: IC6.39 R73.1
RSTB: C170.1 IC6.12 U1.AD32
SCL: IC1.A3 IC4.2 R12.1 U1.AA1-8
SDA: IC1.B1 IC4.3 R13.1 U1.AC1-6
SDMMC0_CLK: D7.2 R32.2 SD1.5
SDMMC0_CMD: D6.2 R31.2 SD1.3
SDMMC0_D0: D11.2 R30.2 SD1.7
SDMMC0_D1: D10.2 R29.2 SD1.8
SDMMC0_D2: D9.2 R28.2 SD1.1
SDMMC0_D3: D8.2 R27.2 SD1.2
SDMMC0_DETN: D5.2 R19.2 SD1.9
SDMMC0_PWREN: R40.1 U1.D31
SDMMC0_VOL_CTRL: R36.1 U1.R31
SDMMC1_CLK: CN2.1 R46.2
SDMMC1_CMD: CN2.5 U1.B21
SDMMC1_D0: CN2.7 U1.A22
SDMMC1_D1: CN2.9 U1.A23
SDMMC1_D2: CN2.11 U1.A20
SDMMC1_D3: CN2.13 U1.B20
SW1: C34.2 IC4.14 L7.1
SW2: C27.1 IC4.8 L6.1
SW3: IC4.22 L4.1
UART0_RX: D2.2 H1.1 R17.2
UART0_TX: D3.2 H1.2 R18.2
USB_DRD_N: CN2.21 R52.2
USB_DRD_P: CN2.23 R51.2
USB_HOST_N: CN2.17 R54.2
USB_HOST_P: CN2.19 R53.2
USB_VBUS: CN2.25 R55.2
VCC0V6_DDR: C16.2 C75.2 C77.2 C98.2 C99.2 C100.2 C101.2 C102.2 C103.2 C104.2 C105.2 C106.2 C107.2 C108.2 C109.2 C110.2 C111.2 C112.2 C113.2 C114.2 C115.2 IC3.5 L3.2 U1.E2-4 U1.F2-4 U2.AA3 U2.AA5 U2.AA8 U2.AA10 U2.B3 U2.B5 U2.B8 U2.B10 U2.D1 U2.D5 U2.D8 U2.D12 U2.F3 U2.F10 U2.U3 U2.U10 U2.W1 U2.W5 U2.W8 U2.W12
VCC0V9: C13.2 C14.2 C62.2 C64.2 L2.2 R4.2 U1.K2-4 U1.K2-5
VCC3V3: C22.2 C133.2 C134.2 C135.2 C136.2 C137.2 C146.2 C152.2 C156.2 C157.2 C189.2 IC4.24 Q3.2 R33.1 R39.2 R57.2 U1.E2-12 U1.F2-12 U1.K2-2 U1.L2-9 U3.E6 U3.F5 U3.J10 U3.K9 U4.4
VCC3V3_SD: C143.2 C144.2 C145.2 D4.2 Q3.3 R38.2 SD1.4
VCC_1V8: C38.2 C42.2 C63.2 C116.2 C117.2 C118.2 C119.2 C120.2 C121.2 C122.2 C124.2 C125.2 C128.2 C129.2 C130.2 C131.2 C132.2 C147.2 C153.2 C160.2 C163.2 C164.2 C165.2 C169.2 C185.2 FPC1.30 IC4.16 IC6.28 L8.2 L9.2 R23.2 R24.2 R26.2 R50.1 R58.2 R59.2 R70.2 U1.B2-8 U1.C2-13 U1.G2-12 U1.J2-2 U1.J2-4 U1.J2-12 U1.K2-11 U1.L2-2 U1.L2-11 U2.F1 U2.F12 U2.G4 U2.G9 U2.T4 U2.T9 U2.U1 U2.U12 U3.C6 U3.M4 U3.N4 U3.P3 U3.P5
VCC_1V8A: C148.2 C149.1 L8.1 R48.2 U1.B2-9
VCC_DDR: C19.2 C20.2 C67.2 C68.2 C69.2 C70.2 C71.2 C72.2 C73.2 C74.2 C76.2 C80.2 C81.2 C82.2 C83.2 C84.2 C85.2 C86.2 C87.2 C88.2 C89.2 C90.2 C91.2 C92.2 C93.2 C94.2 C95.2 C96.2 C97.2 L4.2 R9.2 R20.1 R21.1 R22.1 U1.C2-3 U1.C2-4 U1.C2-5 U1.D2-3 U1.E2-3 U1.F2-3 U2.A4 U2.A9 U2.AB4 U2.AB9 U2.F5 U2.F8 U2.G2 U2.H1 U2.H5 U2.H8 U2.H12 U2.K1 U2.K3 U2.K10 U2.K12 U2.N1 U2.N3 U2.N10 U2.N12 U2.R1 U2.R5 U2.R8 U2.R12 U2.T2 U2.U5 U2.U8
VCCIO_SD: C138.1 C140.2 C141.1 IC5.5 R34.2 U1.L2-10
VDC: C18.2 IC4.20 R7.1 R8.2
VDD_ARM: C28.2 C50.2 C51.2 C52.2 C53.2 C54.2 IC4.27 L5.2 U1.H2-6 U1.H2-7 U1.H2-8 U1.J2-6 U1.J2-7 U1.J2-8 U1.J2-9
VDD_NPU: C35.2 C36.2 C37.2 C55.2 C56.2 C57.2 C58.2 C59.2 IC4.12 L7.2 U1.D2-6 U1.D2-7 U1.D2-8 U1.E2-6 U1.E2-7 U1.E2-8
VDD_VEPU_LOGIC: C5.2 C6.2 C7.2 C43.2 C44.2 C45.2 C46.2 C47.2 C48.2 C49.2 IC1.A4 L1.2 U1.E2-5 U1.E2-10 U1.F2-5 U1.F2-10 U1.G2-5 U1.G2-10 U1.H2-4
VFB3: C20.1 IC4.23 R9.1 R10.2
XIN: C60.2 R16.2 U1.AL15 X1.1
XOUT: C61.1 R15.2 X1.3
pads on no net: IC4.25 IC6.35 U1.A1-8 U1.A1-14 U1.A1-16 U1.A1-18 U1.A2-10 U1.A2-11 U1.A2-12 U1.A8 U1.A13 U1.A16 U1.A17 U1.A25 U1.A26 U1.A28 U1.A29 U1.A31 U1.AA1-4 U1.AA1-6 U1.AA1-10 U1.AA1-12 U1.AA1-14 U1.AA1-16 U1.AA1-22 U1.AB1-2 U1.AB1-4 U1.AB1-8 U1.AB1-10 U1.AB1-12 U1.AB1-14 U1.AB1-16 U1.AB1-22 U1.AC1-2 U1.AC1-4 U1.AC1-8 U1.AC1-12 U1.AC1-14 U1.AC1-16 U1.AC1-22 U1.AC32 U1.AG2 U1.AL6 U1.AL7 U1.AL12 U1.AL17 U1.AL18 U1.AL22 U1.AL29 U1.AL30 U1.AM4 U1.AM5 U1.AM7 U1.AM8 U1.AM13 U1.AM16 U1.AM17 U1.AM22 U1.B1-14 U1.B1-16 U1.B1-18 U1.B2-10 U1.B2-11 U1.B2-12 U1.B10 U1.B17 U1.B18 U1.B19 U1.B24 U1.B25 U1.B27 U1.B28 U1.B29 U1.B30 U1.B31 U1.B32 U1.C1-12 U1.C1-16 U1.C1-18 U1.C1-22 U1.C2-11 U1.C2-12 U1.C32 U1.D1-21 U1.D1-22 U1.D1-23 U1.D2-13 U1.E2-13 U1.E31 U1.E32 U1.F1-22 U1.F1-23 U1.F31 U1.F32 U1.G31 U1.H1-21 U1.H1-22 U1.H1-23 U1.H32 U1.J2-1 U1.J31 U1.J32 U1.K1-23 U1.K31 U1.L2-3 U1.L2-5 U1.L2-6 U1.L31 U1.L32 U1.M1-21 U1.M1-23 U1.M2-2 U1.M2-3 U1.M2-6 U1.M2-7 U1.M32 U1.N2-7 U1.N2-8 U1.N31 U1.P1-3 U1.P31 U1.P32 U1.R32 U1.T1-1 U1.T1-2 U1.T1-3 U1.T1-21 U1.T1-22 U1.V1-1 U1.Y1-21 U2.A1 U2.A2 U2.A11 U2.A12 U2.AA1 U2.AA12 U2.AB1 U2.AB2 U2.AB11 U2.AB12 U2.B1 U2.B12 U2.G11 U2.K5 U2.K8 U2.N5 U2.N8 U3.A1 U3.A2 U3.A7 U3.A8 U3.A9 U3.A10 U3.A11 U3.A12 U3.A13 U3.A14 U3.B1 U3.B7 U3.B8 U3.B9 U3.B10 U3.B11 U3.B12 U3.B13 U3.B14 U3.C1 U3.C3 U3.C5 U3.C7 U3.C8 U3.C9 U3.C10 U3.C11 U3.C12 U3.C13 U3.C14 U3.D1 U3.D2 U3.D3 U3.D4 U3.D12 U3.D13 U3.D14 U3.E1 U3.E2 U3.E3 U3.E5 U3.E8 U3.E9 U3.E10 U3.E12 U3.E13 U3.E14 U3.F1 U3.F2 U3.F3 U3.F10 U3.F12 U3.F13 U3.F14 U3.G1 U3.G2 U3.G3 U3.G10 U3.G12 U3.G13 U3.G14 U3.H1 U3.H2 U3.H3 U3.H5 U3.H12 U3.H13 U3.H14 U3.J1 U3.J2 U3.J3 U3.J12 U3.J13 U3.J14 U3.K1 U3.K2 U3.K3 U3.K6 U3.K7 U3.K10 U3.K12 U3.K13 U3.K14 U3.L1 U3.L2 U3.L3 U3.L12 U3.L13 U3.L14 U3.M1 U3.M2 U3.M3 U3.M7 U3.M8 U3.M9 U3.M10 U3.M11 U3.M12 U3.M13 U3.M14 U3.N1 U3.N3 U3.N6 U3.N7 U3.N8 U3.N9 U3.N10 U3.N11 U3.N12 U3.N13 U3.N14 U3.P1 U3.P2 U3.P7 U3.P8 U3.P9 U3.P10 U3.P11 U3.P12 U3.P13 U3.P14

## Keep-outs
Keep-Out Layer:
  lines w1: -0.005,0.894 -0.005,38.857 ; 0,0.889 ccw(c0.953,0.953) 1.016,0 ; 0,38.989 cw(c0.952,39.052) 0.889,40.005 ; 0.884,0.005 39.111,0.005 ; 1.143,40.005 39.194,40.005 ; 38.989,40.005 cw(c39.052,39.052) 40.005,39.116 ; 39.106,0 ccw(c39.042,0.953) 39.995,1.016 ; 39.995,0.889 39.995,39.204

## Text inside footprints (layer, text, board x,y; h text height)
SD1: Top Overlay "CUTAWAY3" at 5.666,17.12 h1 r270